# Altium PCB PCB1.PcbDoc
Units mm, origin at the board's own origin, x right, y up, seen from the top; angles counter-clockwise.
Board outline 98.24 x 98.24 mm, 2 copper layers (Top Layer, Bottom Layer); 30 components, 21 nets, 109 pads, 96 vias.
Unrouted connection lines stored in the file: 5.
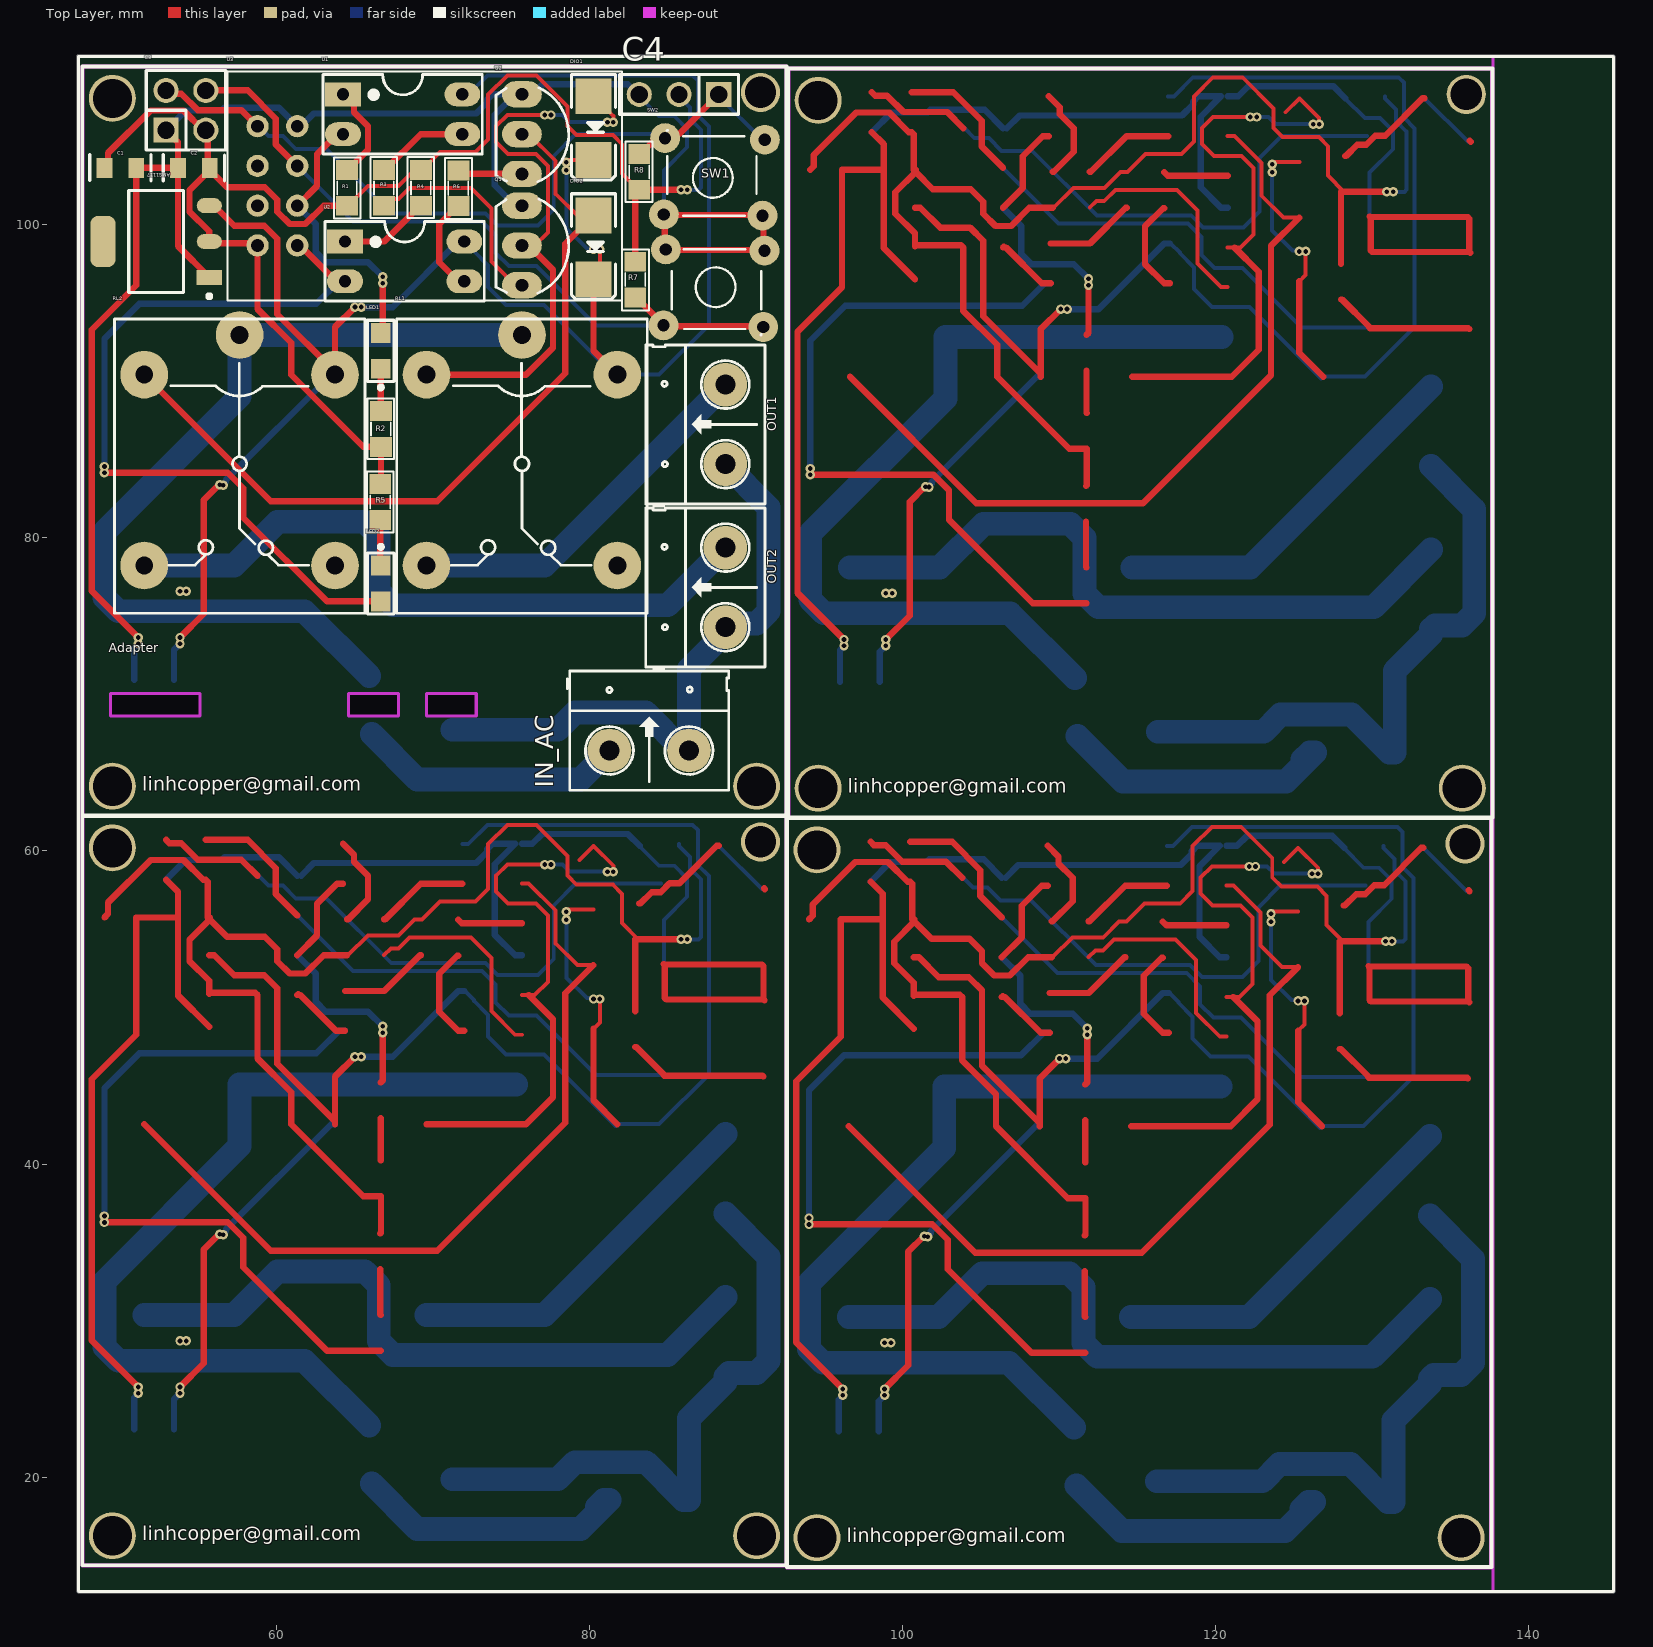
[diagram p0: Top Layer view]
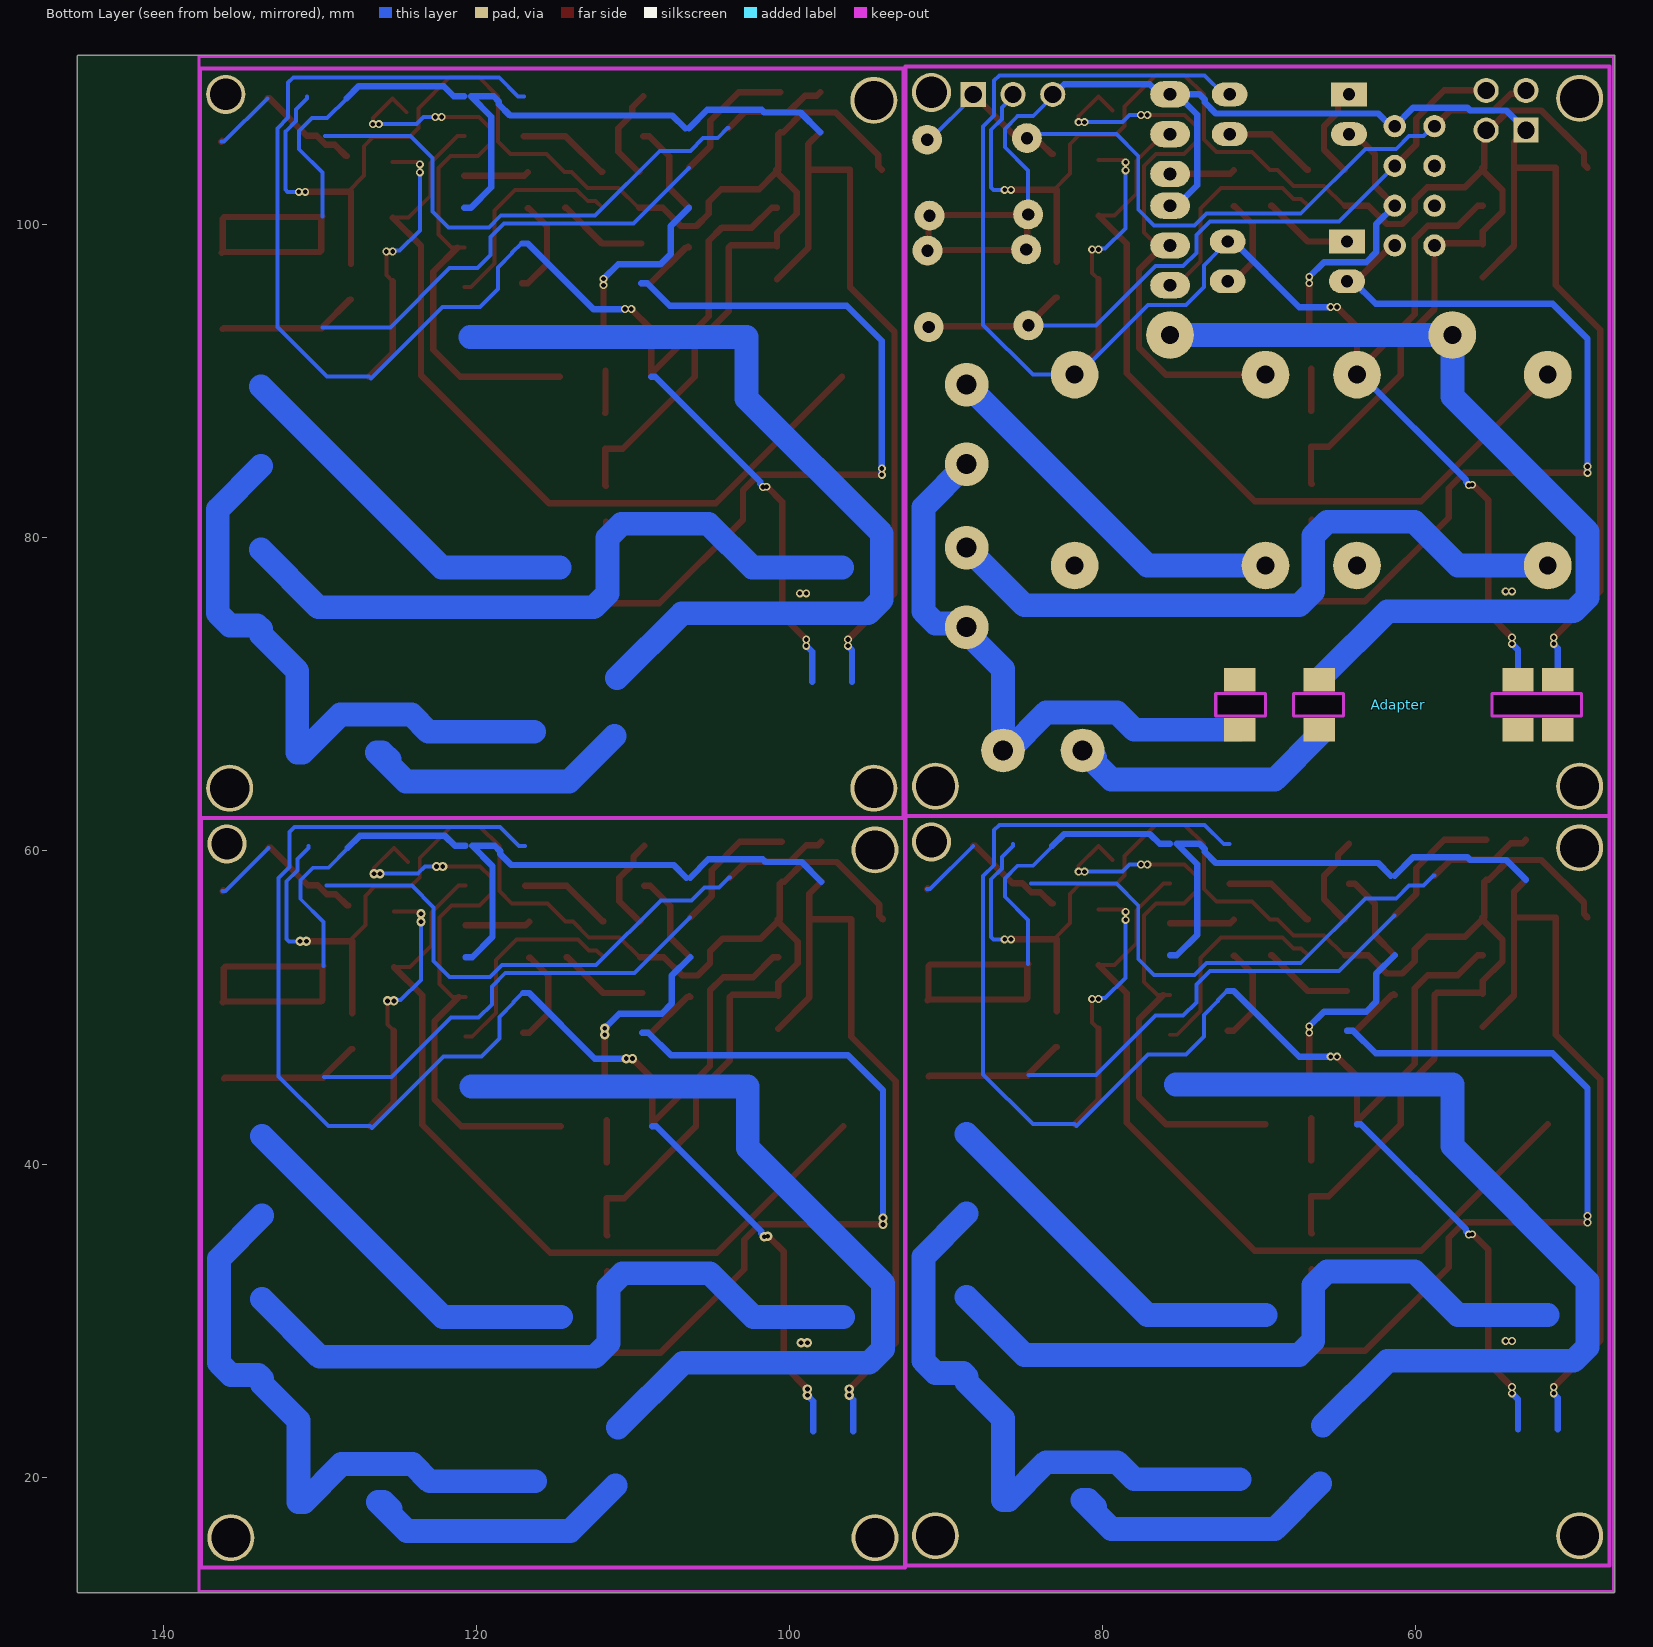
[diagram p1: Bottom Layer view, seen from below]
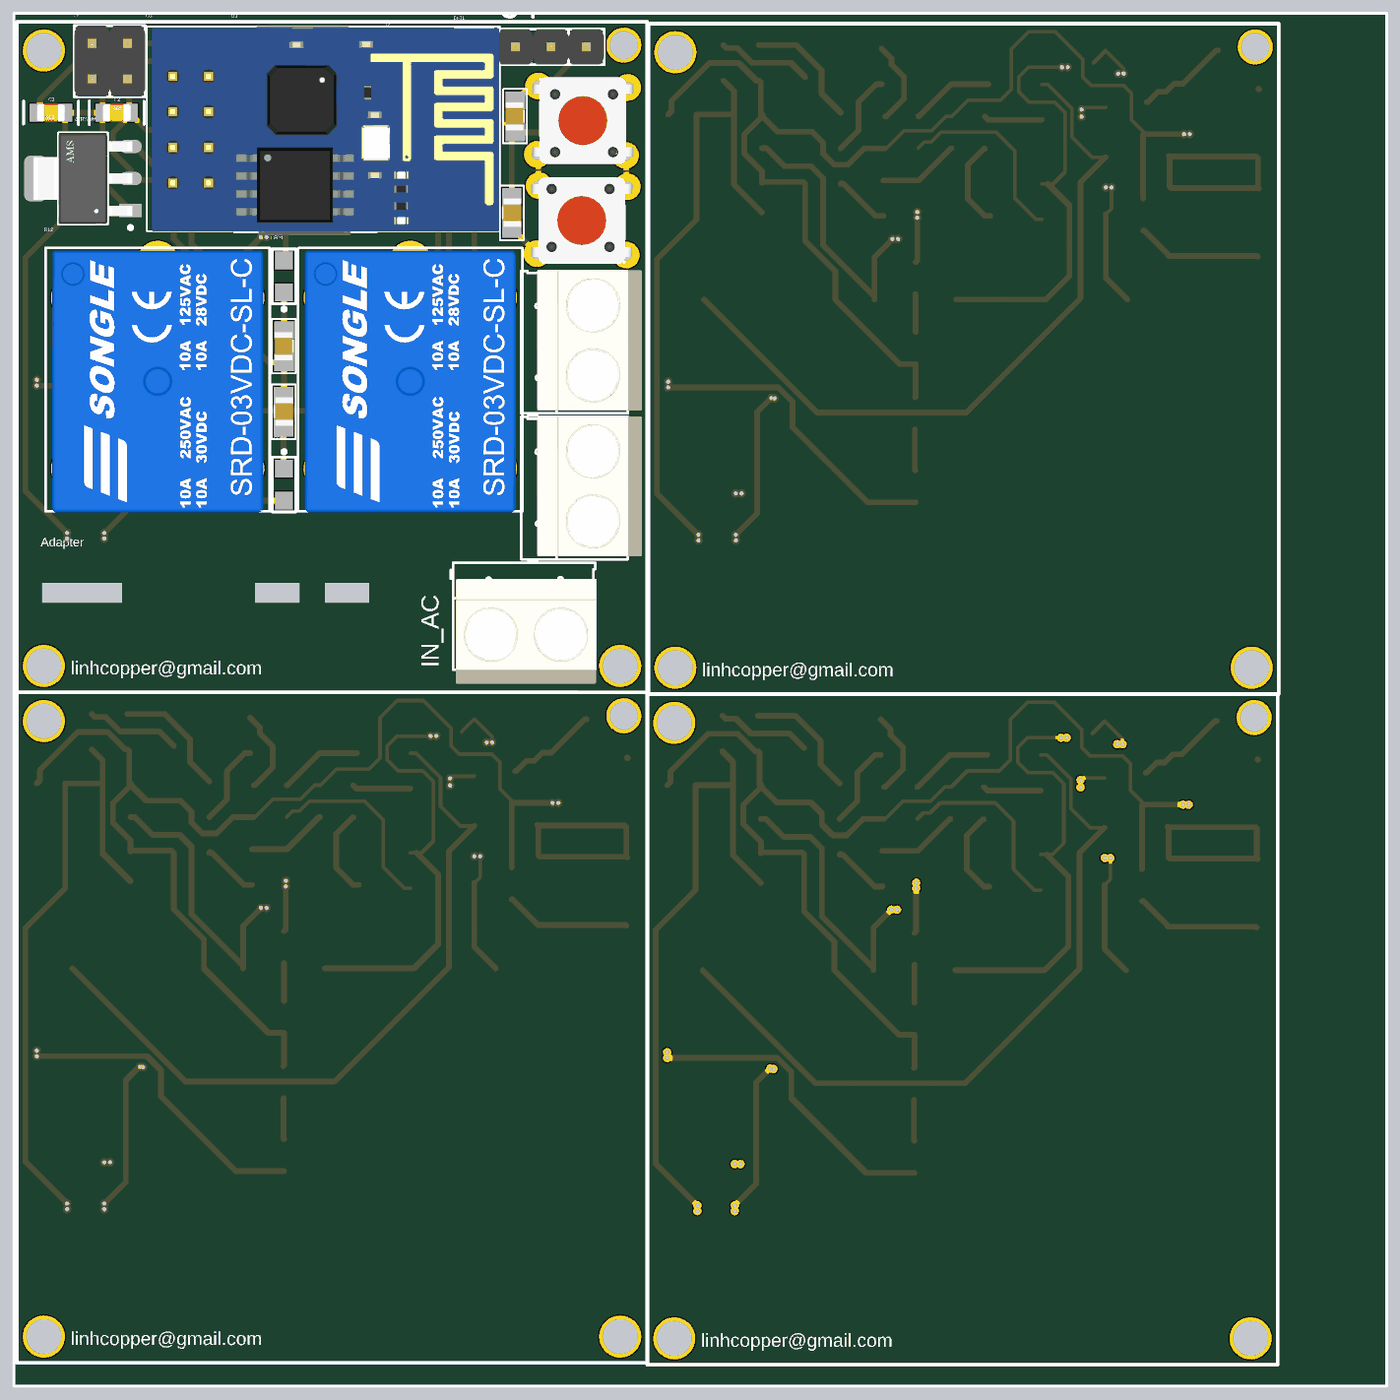
[diagram p2: 3D render of the assembled board from above, using the file's embedded part models]

## Layer stack, top to bottom
Top Solder: solder mask 0.0102, Solder Resist, Dk 3.5
Top Layer: signal copper 0.0356
Dielectric 1: dielectric 0.32, FR-4, Dk 4.8
Bottom Layer: signal copper 0.0356
Bottom Solder: solder mask 0.0102, Solder Resist, Dk 3.5

## Board outline
47.271,12.722 47.271,110.722 cw(c47.371,110.722) 47.271,110.733 cw(c47.371,110.744) 47.371,110.844 145.393,110.844 cw(c145.393,110.744) 145.464,110.815 145.486,110.793 cw(c145.415,110.722) 145.515,110.722 145.515,12.722 cw(c145.415,12.722) 145.474,12.641 cw(c145.393,12.7) 145.393,12.6 47.393,12.6 cw(c47.393,12.7) 47.312,12.641 cw(c47.371,12.722)

## Design rules (kind name [scope] priority, off if disabled: settings)
Clearance [All] p1: gap=0.254 ignorepadtopadclearanceinfootprint=FALSE except(0: Arc-Hole Track-Hole SMDPad-Hole THPad-Hole Via-Hole Fill-Hole Poly-Hole Region-Hole Text-Hole)
PolygonConnect [All] p1: connectstyle=Relief reliefconductorwidth=0.254 reliefentries=4 polygonreliefangle="90 Angle" airgapwidth=0.254
RoutingVias [All] p1: holewidth=0.711 width=1.27 viastyle="Through Hole" minholewidth=0.711 minwidth=1.27 maxholewidth=0.711 maxwidth=1.27
SolderMaskExpansion [All] p1: expansion=0.102 istentingtop=FALSE
Width [All] p1: maxlimit=0.254 minlimit=0.254 preferedwidth=0.254
30 further rules are at their usual default settings.

## Components (designator, comment, footprint, x,y, rotation, side; value= is the part's Value field where it differs from the comment)
Adapter "power_220v_to_5v" POWER_220V_TO_5V 59.817,69.342 r90 top
AMS1117 "AMS1117-3.3" Advanced_Monolithic_Systems_AMS1117_IPC_A 52.324,98.933 r180 top locked
C1 "Capacitor Ceramic" C0805 50.038,103.632 r180 top value=33p
C2 "Capacitor Ceramic" C0805 54.737,103.632 r0 top locked value=33p
C3 "Power" JP2-D2T 54.229,107.315 r0 top locked
C4 "JP3" JP3-D1T 88.265,108.331 r180 top locked
DIO1 "Diode SMD" DIO-SMD-106 80.264,106.172 r90 top locked value=1N5007
DIO2 "Diode SMD" DIO-SMD-106 80.264,98.552 r90 top value=1N5007
IN_AC "" HED2 81.28,66.421 r0 top value="Header 2"
LED1 "" LED0805 66.675,91.948 r90 top locked
LED2 "" LED0805 66.675,77.089 r270 top
OUT1 "" HED2 88.684,84.709 r90 top locked value="Header 2"
OUT2 "" HED2 88.684,74.295 r90 top locked value="Header 2"
Q1 "2SC1815" TO92-123 75.692,98.679 r270 top locked value=C1815
Q2 "2SC1815" TO92-123 75.692,105.791 r270 top locked value=C1815
R1 "" SM-0805 64.516,102.362 r90 top locked value=1K
R2 "" SM-0805 66.686,86.959 r270 top value=1K
R3 "" SM-0805 66.878,102.362 r270 top locked value=1K
R4 "" SM-0805 69.24,102.362 r270 top locked value=1K
R5 "" SM-0805 66.639,82.296 r90 top value=1K
R6 "" SM-0805 71.628,102.337 r90 top value=1K
R7 "" SM-0805 82.931,96.495 r90 top value=1K
R8 "" SM-0805 83.185,103.378 r270 top value=1K
RL1 "Relay 10A/12V" RL_SPDT_10A 75.692,92.964 r270 top locked value="Relay SPDT, 10A, 12V"
RL2 "Relay 10A/12V" RL_SPDT_10A 57.658,92.964 r270 top locked value="Relay SPDT, 10A, 12V"
SW1 "SW" SW4 84.887,98.425 r0 top locked value="Button chip 4 pin"
SW2 "SW" SW4 91.059,100.584 r180 top locked value="Button chip 4 pin"
U1 "PC817" DIP4 64.262,108.331 r270 top locked
U2 "PC817" DIP4 64.389,98.933 r270 top locked
U3 "ESP-01" ESP8266 60.249,102.54 r90 top locked

## Footprints (in the part's own frame and the unit in brackets; to place one, negate y for a bottom-side part, rotate by r counter-clockwise, add the part's x,y. Pads: shape width x height; smd on the part's side, far side on the other; paste and mask are expansions set on the pad)
Advanced_Monolithic_Systems_AMS1117_IPC_A [mm]
  rect 1.604x0.952 smd paste+0 mask+0: 1(-3.395,2.29)
  rrect100% 1.604x0.952 smd paste+0 mask+0: 2(-3.395,0) 3(-3.395,-2.29)
  rrect59% 1.604x3.262 smd paste+0 mask+0: 4(3.395,0)
  silkscreen extent -3.52,-3.25 1.75,3.62, body extent -4.7,-3.75 4.7,3.75, height 0.25
C0805 [mm] "Chip Resistor; Body 2.0 x 1.3 mm (LxW typ)"
  rect 1x1.27 smd: 1(-1.016,0) 2(1.016,0)
  silkscreen extent -1.96,-0.84 1.96,0.84, body extent -1,-0.62 1,0.63, height 0.78
DIO-SMD-106 [mil]
  rect 90x90.55 smd: 1(80,0) 2(-80,0)
  silkscreen extent -130,-55 135,55, body extent -99,-50 106,52, height 95
DIP4 [mil]
  rect 60x90 hole 31: 1(0,0)
  oval 60x90 hole 31: 2(100,0) 3(100,300) 4(0,300)
  silkscreen extent -50,-50 150,350, body extent -59,-10 159,305, height 170
ESP8266 [mil]
  round 56 hole 32: 1(148,57) 2(48,57) 3(-52,57) 4(-152,57) 5(-152,-43) 6(-52,-43) 7(48,-43) 8(148,-43)
  silkscreen extent -290,-860 285,132, body extent -290,-858 281,118, height 566
HED2 [mil] "Header 2, 2 pin, hight 300mil, Pin to Pin 200, Colour Green"
  round 110 hole 50: 1(0,0) 2(200,0)
  silkscreen extent -106,-100 300,200, body extent -92,-140 302,155, height 394
JP2-D2T [mm] "4 pins, dual pin, straight, gold plating"
  rect 1.6x1.6 hole 1.1: 1(-1.27,-1.27)
  round 1.6 hole 1.1: 2(1.27,-1.27) 3(1.27,1.27) 4(-1.27,1.27)
  silkscreen extent -2.54,-2.54 2.54,2.54, body extent -2.54,-2.54 2.54,2.54, height 8.55
JP3-D1T [mm] "3 pins, 1 row, straight, gold plating"
  rect 1.6x1.6 hole 1.1: 1(0,0)
  round 1.6 hole 1.1: 2(2.54,0) 3(5.08,0)
  silkscreen extent -1.27,-1.27 6.35,1.27, body extent -1.27,-1.27 6.35,1.27, height 8.54
LED0805 [mil] "Chip Resistor; Body 2.0 x 1.3 mm (LxW typ)"
  rect 50x50 smd: 1(-45,0) 2(45,0)
  silkscreen extent -97,-33 77,33, body extent -60,-25 60,25, height 47
POWER_220V_TO_5V [mm]
  rect 1.5x2 smd far side: 1(-1.601,-11.43) 1(1.601,-11.43) 2(-1.601,-6.35) 2(1.601,-6.35) 3(-1.601,6.35) 3(1.601,6.35) 4(-1.601,8.89) 4(1.601,8.89)
  Keep-Out Layer board cut-out: -0.711,-12.954 0.711,-12.954 0.711,-9.779 -0.711,-9.779
  Keep-Out Layer board cut-out: -0.711,-7.976 0.711,-7.976 0.711,-4.801 -0.711,-4.801
  Keep-Out Layer board cut-out: -0.711,4.699 -0.711,10.414 0.711,10.414 0.711,4.699
  Keep-Out Layer lines w0.2: -0.711,10.414 -0.711,4.699 0.711,4.699 0.711,10.414 -0.711,10.414 ; -0.711,-4.801 -0.711,-8.001 0.711,-8.001 0.711,-4.801 -0.711,-4.801 ; -0.711,-9.779 -0.711,-12.954 0.711,-12.954 0.711,-9.779 -0.711,-9.779
RL_SPDT_10A [mil] "Relay SPDT, 5 pin, 10A,W 650mil, L 800mil, H 800mil"
  round 120 hole 45: 1(0,0) 2(580,240) 3(580,-240) 4(100,-240) 5(100,240)
  silkscreen extent -40,-315 700,315, body extent -33,-297 703,297, height 588
SM-0805 [mil] "Compoment SMD 80x50mil"
  rect 50x55 smd: 1(-45,0) 2(45,0)
  silkscreen extent -77,-34 76,33, body extent -40,-27 40,23, height 24
SW4 [mil] "SW button 4pin, 250 x250 mil"
  round 75 hole 31: 1(0,0) 2(245,-195) 3(248,-3) 4(-6,-191)
  silkscreen extent 15,-215 240,0, body extent -36,-220 276,24, height 276
TO92-123 [mil] "TO-92"
  oval 66x100 hole 32: 1(-100,0) 2(0,0) 3(100,0)
  silkscreen extent -117,-65 120,118, body extent -109,-66 109,95, height 245

## Part data
C1 C2: library part CapSMD, "Capacitor", LatestRevisionDate=17-Jul-2002, LatestRevisionNote="Re-released for DXP Platform.", PackageReference=RAD-0.3, Published=8-Jun-2000, Publisher="Altium Limited"
C3: library part JP2x2, "WR-PHD 2.54 mm Dual Socket Header", Manufacturer="W¨¹rth Elektronik eiSos GmbH", partNo=61300421821, ComponentLink1 Description=Manufacturer, ComponentLink1URL=http://www.we-online.com, ComponentLink2 Description=Datasheet, ComponentLink2URL=http://katalog.we-online.de/em/datasheet/6130xx21821.pdf, Created by="Karrer Zheng", Created Date="29 March 2013", NoPins=04
C4: "WR-PHD 2.54 mm Angled Socket Header", Manufacturer="W¨¹rth Elektronik eiSos GmbH", partNo=613003143121, ComponentLink1 Description=Manufacturer, ComponentLink1URL=http://www.we-online.com, ComponentLink2 Description=Datasheet, ComponentLink2URL=http://katalog.we-online.de/em/datasheet/6130xx143121.pdf, Created by="Karrer Zheng", Created Date="29 March 2013", NoPins=03
DIO1 DIO2: "Default Diode", Code - JEDEC=DO-214-AB, Published=8-Jun-2000, Publisher="Altium Limited", Revision="July-2002: Re-released for DXP Platform."
IN_AC OUT1 OUT2: library part Hed2, "Header 2 (Green)"
LED1 LED2: library part LED0805, "LED SMD 0805"
Q1 Q2: "NPN 600mW, ECB"
R1 R2 R3 R4 R5 R6 R7 R8: library part RM, "Resistor SMD"
RL1 RL2: library part "Relay 1", "Relay SPDT,10A - 12VDC 5 Pin"
SW1 SW2: library part SW4, "Switch button 4 pin"
U1 U2: "Single Opto"
U3: library part ESP8266-01, "ESP-12 Wi-Fi Module"

## Free pads (board coordinates)
  round 3 hole 2.5: 1(49.53,16.256) 1(49.53,60.198) 1(49.53,64.135) 1(49.53,108.077) 1(90.678,16.256) 1(90.678,64.135) 1(94.539,16.129) 1(94.539,60.071) 1(94.615,64.008) 1(94.615,107.95) 1(135.687,16.129) 1(135.763,64.008)
  round 2.5 hole 2: 1(90.932,60.579) 1(90.932,108.458) 1(135.941,60.452) 1(136.017,108.331)

## Via types
v1: diameter 0.6/0.508 (per signal layer), hole 0.3, Top Layer to Bottom Layer, tented both sides, 72 vias
v2: diameter 0.6, hole 0.3, Top Layer to Bottom Layer, 24 vias

## Nets (pads, with @x,y where several pads share a name; then routed paths per layer and width w, separated by ;. In a path a pad name is that pad's centre, name@x,y a point inside that pad or via, vN(x,y) a via of type N, cw(c..) or ccw(c..) an arc to the next point about the centre after c; other vN are vias at no path point)
3V: AMS1117.2 C1.2 C2.2 C3.2 C4.2 R1.1 R2.2 R4.1 R5.2 R7.2 R8.2 U3.2 U3.4 | length 94.2
  Top Layer w0.254: R1.1 64.579,101.219 65.849,102.489 67.818,102.489 68.834,103.505 R4.1 69.304,103.505 70.447,104.648 72.736,104.648 73.533,105.445 73.533,108.328 74.755,109.55 76.632,109.55 78.613,107.569 78.613,106.299 79.191,105.721 81.515,105.721 82.093,105.143 82.093,103.264 R8.2@83.121,102.235
  Top Layer w0.406: C1.2 49.253,103.863 49.253,104.585 51.97,107.302 54.07,107.302 55.327,106.045 C3.2 55.626,105.918 C2.2@55.626,103.624 ; AMS1117.2@55.719,98.763 55.719,99.577 54.46,100.836 54.46,102.204 C2.2@55.753,103.497 ; C2.2 C2.2@55.753,103.497 ; AMS1117.2@55.823,98.829 58.651,98.829 U3.4 58.801,94.623 60.964,92.459 60.964,90.412 65.561,85.816 R2.2 66.686,83.487 R5.2 ; R1.1 63.023,101.219 61.855,100.051 60.857,100.051 60.071,100.837 60.071,101.601 59.272,102.401 56.849,102.401 C2.2@55.753,103.497 ; R7.2 82.931,102.235 83.121,102.235 R8.2 v1(85.852,102.235)
  Bottom Layer w0.254: C4.2 85.725,108.204 86.436,107.493 86.436,106.757 87.122,106.071 87.122,102.384 86.973,102.235 v1@86.36,102.235
  other v1: 86.258,102.235
5V: Adapter.3 AMS1117.3 DIO1.2 DIO2.2 RL1.5 RL2.5 U1.4 U2.4 | length 121.3
  Top Layer w0.254: v1(78.532,103.989) 78.588,104.045 78.612,104.045 78.707,104.14 DIO1.2 ; DIO2.2 80.67,96.926 v1(80.67,98.425)
  Top Layer w0.406: v1(53.848,73.635) 55.372,75.159 55.372,82.423 56.342,83.393 v1(56.388,83.393) ; AMS1117.3 56.045,101.223 57.319,99.949 59.23,99.949 60.071,99.108 60.071,94.287 RL2.5@63.754,90.604 ; RL2.5 RL2.5@63.754,90.604 ; v1(65.024,94.742) 63.754,93.472 RL2.5@63.754,90.604 ; DIO2.2 80.264,91.948 RL1.5
  Bottom Layer w0.254: U1.4 72.263,108.331 73.482,109.55 85.729,109.55 86.602,109.55 86.944,109.208 86.944,106.967 87.63,106.281 87.63,93.599 84.455,90.424 RL1.5 ; U2.4 72.046,98.933 72.633,98.346 72.633,98.309 73.533,97.409 73.533,96.012 74.676,94.869 77.089,94.869 RL1.5@81.661,90.297 ; v1(78.532,103.48) 78.532,99.776 79.834,98.474 80.215,98.474 v1(80.264,98.425)
  Bottom Layer w0.406: Adapter.3@53.467,70.943 53.467,72.847 v1(53.848,73.228) ; v1(56.611,83.371) 56.611,83.398 56.788,83.576 56.788,83.712 63.5,90.424 RL2.5 ; v1(65.43,94.742) 67.437,94.742 71.628,98.933 U2.4
220L: Adapter.2 IN_AC.1 RL1.1 RL2.1 | length 75.1
  Bottom Layer w1.524: Adapter.2@65.941,71.169 61.799,75.311 49.911,75.311 49.022,76.2 49.022,80.391 57.658,89.027 RL2.1 RL1.1@75.311,92.964 ; Adapter.2@66.1,67.47 69.004,64.566 79.425,64.566 IN_AC.1 80.936,66.421 IN_AC.1@80.479,65.963
220N: Adapter.1 IN_AC.2 OUT1.1 OUT2.1 | length 39.1
  Bottom Layer w1.524: Adapter.1@71.247,67.741 77.978,67.741 79.07,68.834 83.603,68.834 86.016,66.421 IN_AC.2 86.36,71.627 88.684,73.951 OUT2.1 88.927,74.538 90.667,74.538 91.44,75.311 91.44,81.953 OUT1.1
GND: Adapter.4 AMS1117.1 C1.1 C2.1 C3.1 C4.3 Q1.1 Q2.1 SW1.1 SW1.3 SW2.1 SW2.3 U3.8 | length 116.1
  Top Layer w0.406: v1(51.181,73.635) 48.209,76.606 48.209,93.294 51.054,96.139 C1.1 C2.1 ; C3.1 53.721,105.283 C2.1 ; AMS1117.1 53.721,98.641 C2.1 ; SW2.3 SW2.3@84.798,100.622 ; SW1.3 SW1.3@91.148,98.387 ; SW2.3@84.798,100.622 84.823,100.597 84.823,98.489 SW1.1 84.925,98.387 SW1.3@91.148,98.387 ; SW2.3@84.798,100.622 91.021,100.622 SW2.1 91.123,100.52 91.123,98.412 SW1.3@91.148,98.387
  Bottom Layer w0.254: C4.3 83.185,108.204 84.455,106.934 85.433,106.934 86.246,106.121 86.246,104.953 84.76,103.467 SW2.3
  Bottom Layer w0.406: Adapter.4@50.927,70.943 50.927,72.947 51.181,73.201 v1(51.181,73.228) ; C3.1 54.216,107.302 56.527,107.302 56.692,107.467 60.173,107.467 U3.8 ; U3.8@61.583,106.299 62.396,107.112 72.768,107.112 73.482,107.826 73.482,108.001 73.812,108.331 75.26,108.331 73.965,107.036 73.965,102.514 75.26,101.219 Q1.1 ; Q2.1 76.362,108.331 76.997,108.966 82.448,108.966 C4.3@83.21,108.204
GPIO0: LED1.2 U1.2 U3.6 | length 17.6
  Top Layer w0.406: U3.6 62.601,102.479 62.601,104.511 63.881,105.791 U1.2 ; LED1.2 66.802,93.218 v1(66.802,96.266)
  Bottom Layer w0.406: U3.6 62.509,100.051 62.509,98.261 63.158,97.612 65.862,97.612 v1(66.802,96.672)
GPIO1: LED2.2 U2.2 U3.5 | length 51.7
  Top Layer w0.406: v1(49.022,84.15) 56.902,84.15 57.89,83.163 57.89,81.295 63.238,75.946 LED2.2 ; U3.5@61.392,98.73 U3.5 61.531,98.679 63.817,96.393 U2.2
  Bottom Layer w0.406: v1(49.022,84.15) v1(49.022,84.557) 49.022,92.71 51.257,94.945 62.56,94.945 64.008,96.393 U2.2
GPIO2: C3.3 R7.1 SW1.2 SW1.4 U3.7 | length 46.1
  Top Layer w0.406: C3.3 58.167,108.585 59.969,106.783 59.969,105.131 U3.7 ; R7.1 82.995,95.352 84.734,93.612 SW1.4 84.785,93.523 91.059,93.523 SW1.2
  Bottom Layer w0.254: U3.7 64.897,100.203 73.152,100.203 74.004,99.351 74.004,98.211 74.857,97.358 76.629,97.358 80.413,93.574 SW1.4
GPIO3: C3.4 C4.1 R8.1 SW2.2 SW2.4 U3.1 | length 50.4
  Top Layer w0.406: C3.4 53.168,108.376 53.93,108.376 54.978,107.328 57.772,107.328 U3.1 ; R8.1 83.248,104.521 83.978,105.25 84.549,105.25 85.123,105.824 85.758,105.824 88.138,108.204 C4.1@88.265,108.204 ; SW2.4@91.161,105.486 SW2.4
  Bottom Layer w0.254: U3.1 58.865,106.299 59.5,105.664 60.431,105.664 61.244,104.851 63.204,104.851 67.345,100.711 73.362,100.711 74.124,99.949 76.708,99.949 77.724,100.965 77.724,104.394 79.121,105.791 SW2.2@84.582,105.791 ; C4.1@88.265,108.204 91.034,105.435 SW2.4
NetDIO1_1: DIO1.1 Q1.2 RL1.4 | length 37.8
  Top Layer w0.254: Q1.2 76.124,98.679 76.509,98.679 77.343,99.513 77.343,103.756 76.578,104.521 74.806,104.521 74.041,105.286 74.041,106.296 74.755,107.01 v1(77.14,107.01) ; DIO1.1@79.375,107.315 DIO1.1 81.534,106.934 v1(81.534,106.553)
  Top Layer w0.406: RL1.4 75.954,90.424 77.673,92.143 77.673,97.13 Q1.2@76.124,98.679
  Bottom Layer w0.254: v1(77.546,107.01) 78.283,107.01 78.74,106.553 v1(81.153,106.553)
NetDIO2_1: DIO2.1 Q2.2 RL2.4 | length 52.4
  Top Layer w0.254: Q2.2 76.124,105.791 77.851,104.064 77.851,103.967 ; 77.851,103.966 77.851,101.981 79.248,100.584 DIO2.1@80.257,100.584
  Top Layer w0.406: RL2.4 59.639,82.347 70.282,82.347 78.457,90.522 78.457,98.784 DIO2.1@80.257,100.584
NetLED1_1: LED1.1 R2.1 | length 2.7
  Top Layer w0.406: LED1.1 66.675,88.113 R2.1
NetLED2_1: LED2.1 R5.1 | length 2.9
  Top Layer w0.406: R5.1 66.639,78.268 LED2.1
NetQ1_3: Q1.3 R3.2 | length 13.9
  Top Layer w0.254: R3.2 67.315,101.656 67.805,101.656 68.511,102.362 72.44,102.362 73.754,101.048 73.754,97.645 75.26,96.139 Q1.3
NetQ2_3: Q2.3 R6.2 | length 4.2
  Top Layer w0.406: R6.2 71.857,103.251 Q2.3
NetR1_2: R1.2 U1.1 | length 6.1
  Top Layer w0.406: U1.1 64.961,107.632 64.961,107.197 65.862,106.296 65.862,104.788 64.579,103.505 R1.2
NetR3_1: R3.1 U1.3 | length 6
  Top Layer w0.406: R3.1 66.942,103.505 69.228,105.791 U1.3
NetR4_2: R4.2 U2.1 | length 5.8
  Top Layer w0.406: U2.1 66.891,98.933 69.177,101.219 R4.2
NetR6_1: R6.1 U2.3 | length 6.2
  Top Layer w0.406: R6.1 71.564,101.194 70.409,100.038 70.409,97.612 71.628,96.393 U2.3
OUT1: OUT1.2 RL1.3 | length 23.9
  Bottom Layer w1.524: RL1.3 77.127,78.232 OUT1.2
OUT2: OUT2.2 RL2.3 | length 44.1
  Bottom Layer w1.524: RL2.3 57.293,78.232 60.087,81.026 65.655,81.026 66.548,80.133 66.548,76.585 67.441,75.692 85.001,75.692 OUT2.2
pads on no net: AMS1117.4 RL1.2 RL2.2 U3.3
copper on no net: | length 2452.1
  Top Layer w0.254: 64.516,53.34 64.579,53.34 65.849,54.61 67.818,54.61 68.834,55.626 69.24,55.626 69.304,55.626 70.447,56.769 72.736,56.769 73.533,57.566 73.533,60.449 74.755,61.671 76.632,61.671 78.613,59.69 78.613,58.42 79.191,57.842 81.515,57.842 82.093,57.264 82.093,55.385 83.121,54.356 ; 66.878,53.34 67.315,53.777 67.805,53.777 68.511,54.483 72.44,54.483 73.754,53.169 73.754,49.766 75.26,48.26 75.692,48.26 ; 75.692,50.8 76.124,50.8 76.509,50.8 77.343,51.634 77.343,55.877 76.578,56.642 74.806,56.642 74.041,57.407 74.041,58.417 74.755,59.131 v1(77.14,59.131) ; 75.692,57.912 76.124,57.912 77.851,56.185 77.851,56.088 ; 77.851,56.087 77.851,54.102 79.248,52.705 80.257,52.705 ; v1(78.532,56.11) 78.588,56.166 78.612,56.166 78.707,56.261 80.264,56.261 ; 79.375,59.436 80.264,60.325 81.534,59.055 v1(81.534,58.674) ; 80.264,48.641 80.67,49.047 v1(80.67,50.546) ; 109.525,53.213 109.588,53.213 110.858,54.483 112.827,54.483 113.843,55.499 114.249,55.499 114.313,55.499 115.456,56.642 117.745,56.642 118.542,57.439 118.542,60.322 119.764,61.544 121.641,61.544 123.622,59.563 123.622,58.293 124.2,57.715 126.524,57.715 127.101,57.137 127.101,55.258 128.13,54.229 ; 109.601,101.092 109.664,101.092 110.934,102.362 112.903,102.362 113.919,103.378 114.325,103.378 114.389,103.378 115.532,104.521 117.821,104.521 118.618,105.318 118.618,108.201 119.84,109.423 121.717,109.423 123.698,107.442 123.698,106.172 124.276,105.594 126.6,105.594 127.178,105.016 127.178,103.137 128.207,102.108 ; 111.887,53.213 112.324,53.65 112.814,53.65 113.52,54.356 117.448,54.356 118.763,53.042 118.763,49.639 120.269,48.133 120.701,48.133 ; 111.963,101.092 112.4,101.529 112.89,101.529 113.596,102.235 117.525,102.235 118.839,100.921 118.839,97.518 120.345,96.012 120.777,96.012 ; 120.701,50.673 121.133,50.673 121.517,50.673 122.352,51.507 122.352,55.75 121.587,56.515 119.815,56.515 119.05,57.28 119.05,58.29 119.764,59.004 v2(122.149,59.004) ; 120.701,57.785 121.133,57.785 122.859,56.058 122.859,55.961 ; 120.777,98.552 121.209,98.552 121.594,98.552 122.428,99.386 122.428,103.629 121.663,104.394 119.891,104.394 119.126,105.159 119.126,106.169 119.84,106.883 v1(122.225,106.883) ; 120.777,105.664 121.209,105.664 122.936,103.937 122.936,103.84 ; 122.86,55.96 122.86,53.975 124.257,52.578 125.266,52.578 ; 122.936,103.839 122.936,101.854 124.333,100.457 125.342,100.457 ; v2(123.54,55.983) 123.596,56.039 123.62,56.039 123.715,56.134 125.273,56.134 ; v1(123.617,103.862) 123.673,103.918 123.697,103.918 123.792,104.013 125.349,104.013 ; 124.384,59.309 125.273,60.198 126.543,58.928 v2(126.543,58.547) ; 124.46,107.188 125.349,108.077 126.619,106.807 v1(126.619,106.426) ; 125.273,48.514 125.679,48.92 v2(125.679,50.419) ; 125.349,96.393 125.755,96.799 v1(125.755,98.298)
  Top Layer w0.406: v1(49.022,36.271) 56.902,36.271 57.89,35.284 57.89,33.416 63.238,28.067 66.675,28.067 ; 49.022,55.753 49.253,55.984 49.253,56.706 51.97,59.423 54.07,59.423 55.327,58.166 55.499,58.166 55.626,58.039 55.626,55.745 ; v1(51.181,25.756) 48.209,28.727 48.209,45.415 51.054,48.26 51.054,55.753 53.721,55.753 ; 51.562,42.545 59.639,34.468 70.282,34.468 78.457,42.643 78.457,50.905 80.257,52.705 ; 52.959,58.166 53.721,57.404 53.721,55.753 ; 52.959,60.706 53.168,60.497 53.93,60.497 54.978,59.449 57.772,59.449 58.801,58.42 ; v1(53.848,25.756) 55.372,27.28 55.372,34.544 56.342,35.514 v1(56.388,35.514) ; 55.499,60.706 58.167,60.706 59.969,58.904 59.969,57.252 61.341,55.88 ; 55.719,48.764 53.721,50.762 53.721,55.753 ; 55.719,50.884 55.719,51.698 54.46,52.957 54.46,54.325 55.753,55.618 ; 55.719,53.344 56.045,53.344 57.319,52.07 59.23,52.07 60.071,51.229 60.071,46.408 63.754,42.725 ; 55.753,55.753 55.753,55.618 ; 55.823,50.95 58.651,50.95 58.801,50.8 58.801,46.744 60.964,44.58 60.964,42.533 65.561,37.937 66.686,37.937 66.686,35.608 66.639,35.56 ; 61.341,53.34 62.601,54.6 62.601,56.632 63.881,57.912 64.262,57.912 ; 61.392,50.851 61.341,50.8 61.531,50.8 63.817,48.514 64.389,48.514 ; 63.754,42.545 63.754,42.725 ; 64.262,60.452 64.961,59.753 64.961,59.318 65.862,58.417 65.862,56.909 64.579,55.626 64.516,55.626 ; 64.389,51.054 66.891,51.054 69.177,53.34 69.24,53.34 ; 64.516,53.34 63.023,53.34 61.855,52.172 60.857,52.172 60.071,52.958 60.071,53.722 59.272,54.522 56.849,54.522 55.753,55.618 ; v1(65.024,46.863) 63.754,45.593 63.754,42.725 ; 66.639,33.274 66.639,30.389 66.675,30.353 ; 66.675,42.926 66.675,40.234 66.686,40.223 ; 66.675,45.212 66.802,45.339 v1(66.802,48.387) ; 66.878,55.626 66.942,55.626 69.228,57.912 71.882,57.912 ; 69.596,42.545 75.954,42.545 77.673,44.264 77.673,49.251 76.124,50.8 ; 71.628,53.315 71.564,53.315 70.409,52.159 70.409,49.733 71.628,48.514 72.009,48.514 ; 71.628,55.601 71.857,55.372 75.692,55.372 ; 80.264,48.641 80.264,44.069 81.788,42.545 ; 82.931,47.473 82.995,47.473 84.734,45.733 84.734,45.695 84.785,45.644 91.059,45.644 91.11,45.593 ; 82.931,49.759 82.931,54.356 83.121,54.356 83.185,54.356 v1(85.852,54.356) ; 83.185,56.642 83.248,56.642 83.978,57.371 84.549,57.371 85.123,57.945 85.758,57.945 88.138,60.325 88.265,60.325 ; 84.76,52.781 84.798,52.743 ; 91.161,57.607 91.211,57.556 ; 91.186,50.47 91.148,50.508 ; v2(94.031,36.144) 101.911,36.144 102.898,35.157 102.898,33.289 108.247,27.94 111.684,27.94 ; 94.031,55.626 94.262,55.857 94.262,56.579 96.978,59.296 99.079,59.296 100.336,58.039 100.508,58.039 100.635,57.912 100.635,55.618 ; v1(94.107,84.023) 101.987,84.023 102.975,83.036 102.975,81.168 108.323,75.819 111.76,75.819 ; 94.107,103.505 94.338,103.736 94.338,104.458 97.055,107.175 99.155,107.175 100.412,105.918 100.584,105.918 100.711,105.791 100.711,103.497 ; v2(96.19,25.629) 93.218,28.6 93.218,45.288 96.063,48.133 96.063,55.626 98.73,55.626 ; v1(96.266,73.508) 93.294,76.479 93.294,93.167 96.139,96.012 96.139,103.505 98.806,103.505 ; 96.571,42.418 104.648,34.341 115.291,34.341 123.466,42.516 123.466,50.778 125.266,52.578 ; 96.647,90.297 104.724,82.22 115.367,82.22 123.542,90.395 123.542,98.657 125.342,100.457 ; 97.968,58.039 98.73,57.277 98.73,55.626 ; 97.968,60.579 98.177,60.37 98.939,60.37 99.987,59.322 102.781,59.322 103.81,58.293 ; 98.044,105.918 98.806,105.156 98.806,103.505 ; 98.044,108.458 98.253,108.249 99.015,108.249 100.063,107.201 102.857,107.201 103.886,106.172 ; v2(98.857,25.629) 100.381,27.153 100.381,34.417 101.351,35.387 v2(101.397,35.387) ; v1(98.933,73.508) 100.457,75.032 100.457,82.296 101.427,83.266 v1(101.473,83.266) ; 100.508,60.579 103.176,60.579 104.978,58.777 104.978,57.125 106.35,55.753 ; 100.584,108.458 103.252,108.458 105.054,106.656 105.054,105.004 106.426,103.632 ; 100.728,48.637 98.73,50.635 98.73,55.626 ; 100.728,50.757 100.728,51.571 99.468,52.83 99.468,54.198 100.762,55.491 ; 100.728,53.217 101.054,53.217 102.328,51.943 104.238,51.943 105.08,51.102 105.08,46.281 108.763,42.598 ; 100.762,55.626 100.762,55.491 ; 100.804,96.516 98.806,98.514 98.806,103.505 ; 100.804,98.636 100.804,99.45 99.545,100.709 99.545,102.077 100.838,103.37 ; 100.804,101.096 101.13,101.096 102.404,99.822 104.315,99.822 105.156,98.981 105.156,94.16 108.839,90.477 ; 100.832,50.823 103.66,50.823 103.81,50.673 103.81,46.617 105.973,44.453 105.973,42.406 110.569,37.81 111.695,37.81 111.695,35.481 111.647,35.433 ; 100.838,103.505 100.838,103.37 ; 100.908,98.702 103.736,98.702 103.886,98.552 103.886,94.496 106.049,92.332 106.049,90.285 110.646,85.689 111.771,85.689 111.771,83.36 111.724,83.312 ; 106.35,53.213 107.61,54.473 107.61,56.505 108.89,57.785 109.271,57.785 ; 106.401,50.724 106.35,50.673 106.54,50.673 108.826,48.387 109.398,48.387 ; 106.426,101.092 107.686,102.352 107.686,104.384 108.966,105.664 109.347,105.664 ; 106.477,98.603 106.426,98.552 106.616,98.552 108.902,96.266 109.474,96.266 ; 108.763,42.418 108.763,42.598 ; 108.839,90.297 108.839,90.477 ; 109.271,60.325 109.97,59.626 109.97,59.191 110.871,58.29 110.871,56.782 109.588,55.499 109.525,55.499 ; 109.347,108.204 110.046,107.505 110.046,107.07 110.947,106.169 110.947,104.661 109.664,103.378 109.601,103.378 ; 109.398,50.927 111.9,50.927 114.186,53.213 114.249,53.213 ; 109.474,98.806 111.976,98.806 114.262,101.092 114.325,101.092 ; 109.525,53.213 108.032,53.213 106.863,52.045 105.866,52.045 105.08,52.831 105.08,53.595 104.28,54.395 101.858,54.395 100.762,55.491 ; 109.601,101.092 108.108,101.092 106.94,99.924 105.942,99.924 105.156,100.71 105.156,101.474 104.357,102.274 101.934,102.274 100.838,103.37 ; v2(110.033,46.736) 108.763,45.466 108.763,42.598 ; v1(110.109,94.615) 108.839,93.345 108.839,90.477 ; 111.647,33.147 111.647,30.262 111.684,30.226 ; 111.684,42.799 111.684,40.107 111.695,40.096 ; 111.684,45.085 111.811,45.212 v2(111.811,48.26) ; 111.724,81.026 111.724,78.141 111.76,78.105 ; 111.76,90.678 111.76,87.986 111.771,87.975 ; 111.76,92.964 111.887,93.091 v1(111.887,96.139) ; 111.887,55.499 111.95,55.499 114.236,57.785 116.891,57.785 ; 111.963,103.378 112.027,103.378 114.313,105.664 116.967,105.664 ; 114.605,42.418 120.963,42.418 122.682,44.137 122.682,49.124 121.133,50.673 ; 114.681,90.297 121.039,90.297 122.758,92.016 122.758,97.003 121.209,98.552 ; 116.637,53.188 116.573,53.188 115.418,52.032 115.418,49.606 116.637,48.387 117.018,48.387 ; 116.637,55.474 116.865,55.245 120.701,55.245 ; 116.713,101.067 116.649,101.067 115.494,99.911 115.494,97.485 116.713,96.266 117.094,96.266 ; 116.713,103.353 116.942,103.124 120.777,103.124 ; 125.273,48.514 125.273,43.942 126.797,42.418 ; 125.349,96.393 125.349,91.821 126.873,90.297 ; 127.94,47.346 128.003,47.346 129.743,45.606 129.743,45.568 129.794,45.517 136.068,45.517 136.119,45.466 ; 127.94,49.632 127.94,54.229 128.13,54.229 128.194,54.229 v2(130.861,54.229) ; 128.016,95.225 128.079,95.225 129.819,93.485 129.819,93.447 129.87,93.396 136.144,93.396 136.195,93.345 ; 128.016,97.511 128.016,102.108 128.207,102.108 128.27,102.108 v1(130.937,102.108) ; 128.194,56.515 128.257,56.515 128.987,57.244 129.558,57.244 130.132,57.818 130.767,57.818 133.147,60.198 133.274,60.198 ; 128.27,104.394 128.333,104.394 129.063,105.123 129.634,105.123 130.208,105.697 130.843,105.697 133.223,108.077 133.35,108.077 ; 129.769,52.654 129.807,52.616 ; 129.845,100.533 129.883,100.495 ; 136.169,57.48 136.22,57.429 ; 136.195,50.343 136.157,50.381 ; 136.246,105.359 136.296,105.308 ; 136.271,98.222 136.233,98.26 ; 84.798,52.743 84.823,52.718 84.823,50.609 84.887,50.546 84.925,50.508 91.148,50.508 ; 84.798,52.743 91.021,52.743 91.059,52.705 91.123,52.642 91.123,50.533 91.148,50.508 ; 129.807,52.616 129.832,52.591 129.832,50.482 129.896,50.419 129.934,50.381 136.157,50.381 ; 129.807,52.616 136.03,52.616 136.068,52.578 136.131,52.514 136.131,50.406 136.157,50.381 ; 129.883,100.495 129.908,100.47 129.908,98.361 129.972,98.298 130.01,98.26 136.233,98.26 ; 129.883,100.495 136.106,100.495 136.144,100.457 136.207,100.393 136.207,98.285 136.233,98.26
  Bottom Layer w0.254: 58.801,58.42 58.865,58.42 59.5,57.785 60.431,57.785 61.244,56.972 63.204,56.972 67.345,52.832 73.362,52.832 74.124,52.07 76.708,52.07 77.724,53.086 77.724,56.515 79.121,57.912 84.582,57.912 ; 61.341,55.88 64.897,52.324 73.152,52.324 74.004,51.472 74.004,50.332 74.857,49.479 76.629,49.479 80.413,45.695 84.734,45.695 ; 71.882,60.452 72.263,60.452 73.482,61.671 85.729,61.671 86.602,61.671 86.944,61.329 86.944,59.088 87.63,58.402 87.63,45.72 84.455,42.545 81.788,42.545 ; 72.009,51.054 72.046,51.054 72.633,50.467 72.633,50.43 73.533,49.53 73.533,48.133 74.676,46.99 77.089,46.99 81.661,42.418 ; v1(77.546,59.131) 78.283,59.131 78.74,58.674 v1(81.153,58.674) ; v1(78.532,55.601) 78.532,51.897 79.834,50.595 80.215,50.595 v1(80.264,50.546) ; 83.185,60.452 83.185,60.325 84.455,59.055 85.433,59.055 86.246,58.242 86.246,57.074 84.76,55.588 84.76,52.781 ; 85.725,60.452 85.725,60.325 86.436,59.614 86.436,58.878 87.122,58.192 87.122,54.505 86.973,54.356 v1@86.36,54.356 ; 88.265,60.325 91.034,57.556 91.211,57.556 ; 103.81,58.293 103.874,58.293 104.509,57.658 105.44,57.658 106.253,56.845 108.213,56.845 112.353,52.705 118.371,52.705 119.133,51.943 121.717,51.943 122.733,52.959 122.733,56.388 124.13,57.785 129.591,57.785 ; 103.886,106.172 103.95,106.172 104.585,105.537 105.516,105.537 106.329,104.724 108.289,104.724 112.43,100.584 118.447,100.584 119.209,99.822 121.793,99.822 122.809,100.838 122.809,104.267 124.206,105.664 129.667,105.664 ; 106.35,55.753 109.906,52.197 118.161,52.197 119.013,51.345 119.013,50.205 119.866,49.352 121.638,49.352 125.422,45.568 129.743,45.568 ; 106.426,103.632 109.982,100.076 118.237,100.076 119.089,99.224 119.089,98.084 119.942,97.231 121.714,97.231 125.498,93.447 129.819,93.447 ; 116.891,60.325 117.272,60.325 118.491,61.544 130.738,61.544 131.611,61.544 131.953,61.202 131.953,58.961 132.639,58.275 132.639,45.593 129.464,42.418 126.797,42.418 ; 116.967,108.204 117.348,108.204 118.567,109.423 130.814,109.423 131.687,109.423 132.029,109.081 132.029,106.84 132.715,106.154 132.715,93.472 129.54,90.297 126.873,90.297 ; 117.018,50.927 117.055,50.927 117.642,50.34 117.642,50.303 118.542,49.403 118.542,48.006 119.685,46.863 122.098,46.863 126.67,42.291 ; 117.094,98.806 117.131,98.806 117.718,98.219 117.718,98.182 118.618,97.282 118.618,95.885 119.761,94.742 122.174,94.742 126.746,90.17 ; v2(122.555,59.004) 123.292,59.004 123.749,58.547 v2(126.162,58.547) ; v1(122.631,106.883) 123.368,106.883 123.825,106.426 v1(126.238,106.426) ; v2(123.541,55.474) 123.541,51.77 124.843,50.468 125.224,50.468 v2(125.273,50.419) ; v1(123.617,103.353) 123.617,99.649 124.919,98.347 125.3,98.347 v1(125.349,98.298) ; 128.194,60.325 128.194,60.198 129.464,58.928 130.441,58.928 131.255,58.115 131.255,56.947 129.769,55.461 129.769,52.654 ; 128.27,108.204 128.27,108.077 129.54,106.807 130.518,106.807 131.331,105.994 131.331,104.826 129.845,103.34 129.845,100.533 ; 130.734,60.325 130.734,60.198 131.445,59.487 131.445,58.751 132.131,58.065 132.131,54.378 131.982,54.229 v2@131.369,54.229 ; 130.81,108.204 130.81,108.077 131.521,107.366 131.521,106.63 132.207,105.944 132.207,102.257 132.058,102.108 v1@131.445,102.108 ; 133.274,60.198 136.042,57.429 136.22,57.429 ; 133.35,108.077 136.119,105.308 136.296,105.308
  Bottom Layer w0.406: v1(49.022,36.271) v1(49.022,36.678) 49.022,44.831 51.257,47.066 62.56,47.066 64.008,48.514 64.389,48.514 ; 50.927,23.064 50.927,25.068 51.181,25.322 v1(51.181,25.349) ; 52.959,58.166 54.216,59.423 56.527,59.423 56.692,59.588 60.173,59.588 61.341,58.42 ; 53.467,23.064 53.467,24.968 v1(53.848,25.349) ; v1(56.611,35.492) 56.611,35.519 56.788,35.697 56.788,35.833 63.5,42.545 63.754,42.545 ; 61.341,53.34 62.509,52.172 62.509,50.382 63.158,49.733 65.862,49.733 v1(66.802,48.793) ; 61.583,58.42 62.396,59.233 72.768,59.233 73.482,59.947 73.482,60.122 73.812,60.452 75.26,60.452 73.965,59.157 73.965,54.635 75.26,53.34 75.692,53.34 ; v1(65.43,46.863) 67.437,46.863 71.628,51.054 72.009,51.054 ; 75.692,60.452 76.362,60.452 76.997,61.087 82.448,61.087 83.21,60.325 ; v2(94.031,36.144) v2(94.031,36.551) 94.031,44.704 96.266,46.939 107.569,46.939 109.017,48.387 109.398,48.387 ; v1(94.107,84.023) v1(94.107,84.43) 94.107,92.583 96.342,94.818 107.645,94.818 109.093,96.266 109.474,96.266 ; 95.936,22.937 95.936,24.941 96.19,25.195 v2(96.19,25.222) ; 96.012,70.816 96.012,72.82 96.266,73.074 v1(96.266,73.101) ; 97.968,58.039 99.225,59.296 101.536,59.296 101.701,59.461 105.181,59.461 106.35,58.293 ; 98.044,105.918 99.301,107.175 101.612,107.175 101.777,107.34 105.258,107.34 106.426,106.172 ; 98.476,22.937 98.476,24.841 v2(98.857,25.222) ; 98.552,70.816 98.552,72.72 v1(98.933,73.101) ; v2(101.619,35.365) 101.619,35.392 101.797,35.57 101.797,35.706 108.509,42.418 108.763,42.418 ; v1(101.696,83.244) 101.696,83.271 101.873,83.449 101.873,83.585 108.585,90.297 108.839,90.297 ; 106.35,53.213 107.518,52.045 107.518,50.255 108.167,49.606 110.871,49.606 v2(111.811,48.666) ; 106.426,101.092 107.594,99.924 107.594,98.134 108.243,97.485 110.947,97.485 v1(111.887,96.545) ; 106.592,58.293 107.405,59.106 117.777,59.106 118.491,59.82 118.491,59.995 118.821,60.325 120.269,60.325 118.974,59.03 118.974,54.508 120.269,53.213 120.701,53.213 ; 106.668,106.172 107.481,106.985 117.853,106.985 118.567,107.699 118.567,107.874 118.897,108.204 120.345,108.204 119.05,106.909 119.05,102.387 120.345,101.092 120.777,101.092 ; v2(110.439,46.736) 112.446,46.736 116.637,50.927 117.018,50.927 ; v1(110.515,94.615) 112.522,94.615 116.713,98.806 117.094,98.806 ; 120.701,60.325 121.371,60.325 122.006,60.96 127.457,60.96 128.219,60.198 ; 120.777,108.204 121.447,108.204 122.082,108.839 127.533,108.839 128.295,108.077
  Bottom Layer w1.524: 51.562,30.353 57.293,30.353 60.087,33.147 65.655,33.147 66.548,32.254 66.548,28.706 67.441,27.813 85.001,27.813 88.684,31.496 ; 65.941,23.29 61.799,27.432 49.911,27.432 49.022,28.321 49.022,32.512 57.658,41.148 57.658,45.085 75.311,45.085 ; 66.1,19.591 69.004,16.687 79.425,16.687 81.28,18.542 80.936,18.542 80.479,18.084 ; 69.596,30.353 77.127,30.353 88.684,41.91 ; 71.247,19.862 77.978,19.862 79.07,20.955 83.603,20.955 86.016,18.542 86.36,18.542 86.36,23.748 88.684,26.072 88.684,26.416 88.927,26.659 90.667,26.659 91.44,27.432 91.44,34.074 88.684,36.83 ; 96.571,30.226 102.301,30.226 105.095,33.02 110.664,33.02 111.557,32.127 111.557,28.579 112.45,27.686 130.01,27.686 133.693,31.369 ; 96.647,78.105 102.378,78.105 105.172,80.899 110.74,80.899 111.633,80.006 111.633,76.458 112.526,75.565 130.086,75.565 133.769,79.248 ; 110.949,23.163 106.808,27.305 94.92,27.305 94.031,28.194 94.031,32.385 102.667,41.021 102.667,44.958 120.32,44.958 ; 111.026,71.042 106.884,75.184 94.996,75.184 94.107,76.073 94.107,80.264 102.743,88.9 102.743,92.837 120.396,92.837 ; 111.108,19.464 114.012,16.56 124.434,16.56 126.289,18.415 125.945,18.415 125.487,17.957 ; 111.185,67.343 114.089,64.439 124.51,64.439 126.365,66.294 126.021,66.294 125.564,65.836 ; 114.605,30.226 122.136,30.226 133.693,41.783 ; 114.681,78.105 122.212,78.105 133.769,89.662 ; 116.256,19.735 122.986,19.735 124.079,20.828 128.612,20.828 131.025,18.415 131.369,18.415 131.369,23.621 133.693,25.945 133.693,26.289 133.936,26.532 135.676,26.532 136.449,27.305 136.449,33.947 133.693,36.703 ; 116.332,67.614 123.063,67.614 124.155,68.707 128.688,68.707 131.101,66.294 131.445,66.294 131.445,71.5 133.769,73.824 133.769,74.168 134.012,74.411 135.752,74.411 136.525,75.184 136.525,81.826 133.769,84.582
  other v1: 53.848,28.702 54.254,28.702 86.258,54.356 98.933,76.454 99.339,76.454 53.848,76.581 54.254,76.581 131.343,102.108
  other v2: 98.857,28.575 99.263,28.575 131.267,54.229

## Keep-outs
Keep-Out Layer:
  lines w0.2: 47.371,12.7 137.719,12.7 137.719,110.744 47.371,110.744 47.371,12.7
  lines w0.254: 83.058,62.23 92.583,62.23 ; 83.058,110.109 92.583,110.109 92.583,62.23 ; 83.439,62.23 47.625,62.23 ; 83.439,110.109 47.625,110.109 47.625,62.23 ; 128.067,62.103 137.592,62.103 137.592,14.224 92.634,14.224 92.634,62.103 128.448,62.103 ; 128.143,109.982 137.668,109.982 137.668,62.103 92.71,62.103 92.71,109.982 128.524,109.982 ; 47.625,62.23 47.625,14.351 92.583,14.351 92.583,62.23 ; 47.625,62.23 92.583,62.23

## Other copper
Top Layer:
  region: 96.571,42.418
  region: 51.562,42.545
  region: 96.647,90.297
  region: 51.562,90.424

## Silkscreen, mask and mechanical layers (free items; w line width, h text height)
Top Overlay:
  lines w0.2: 47.371,12.722 47.371,110.722 ; 47.371,110.744 145.393,110.744 145.415,110.722 145.415,12.722 ; 47.393,12.7 145.393,12.7 ; 92.603,14.371 92.605,14.373 ; 92.603,62.25 92.605,62.252 ; 137.612,14.244 137.614,14.246 ; 137.688,62.123 137.69,62.125
  lines w0.254: 92.603,14.371 87.63,14.371 47.605,14.371 47.605,62.24 92.605,62.24 92.605,14.373 ; 92.603,62.25 87.63,62.25 47.605,62.25 47.605,110.119 92.605,110.119 92.605,62.252 ; 137.612,14.244 132.639,14.244 92.614,14.244 92.614,62.113 137.614,62.113 137.614,14.246 ; 137.688,62.123 132.715,62.123 92.69,62.123 92.69,109.992 137.69,109.992 137.69,62.125
  text "linhcopper@gmail.com" at 51.435,63.534 h1.52
  text "linhcopper@gmail.com" at 96.52,63.407 h1.52
  text "linhcopper@gmail.com" at 51.435,15.655 h1.52
  text "linhcopper@gmail.com" at 96.444,15.528 h1.52